# Altium PCB PCB_DTTT1.PcbDoc
Units mm, origin at the board's own origin, x right, y up, seen from the top; angles counter-clockwise.
Board outline 89.03 x 74.3 mm, 2 copper layers (Top Layer, Bottom Layer); 28 components, 18 nets, 65 pads, 1 vias.
Unrouted connection lines stored in the file: 42.
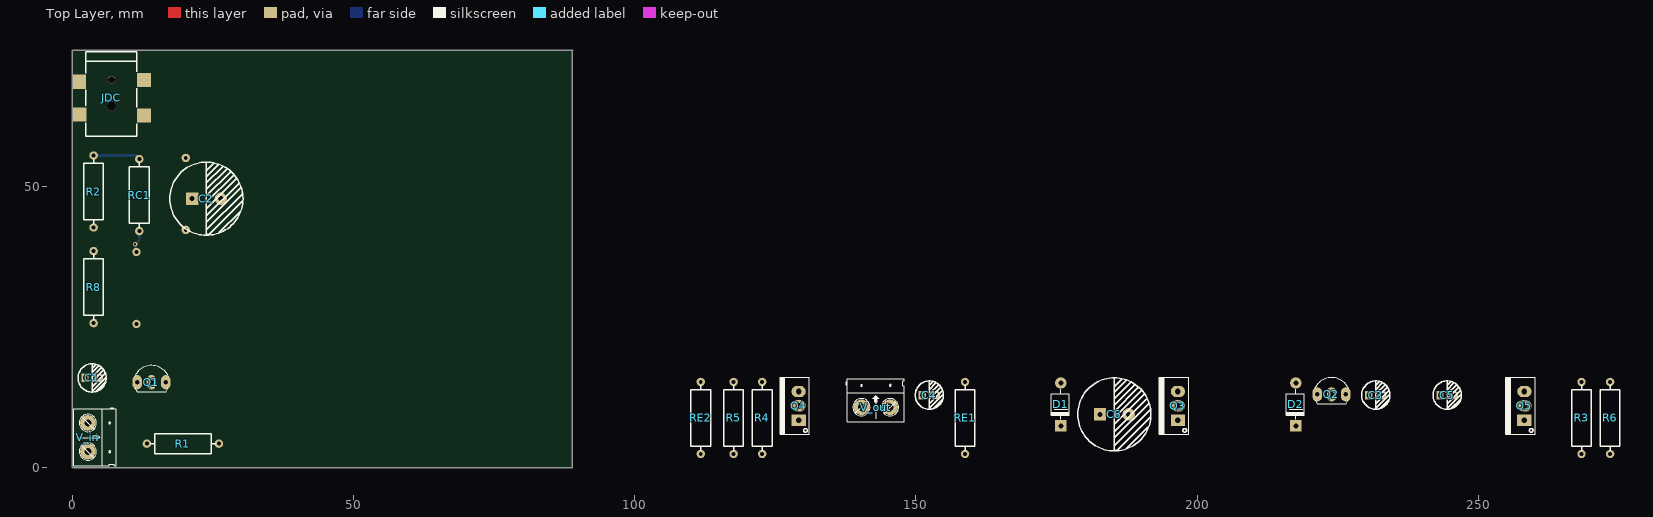
[diagram p0: Top Layer view]
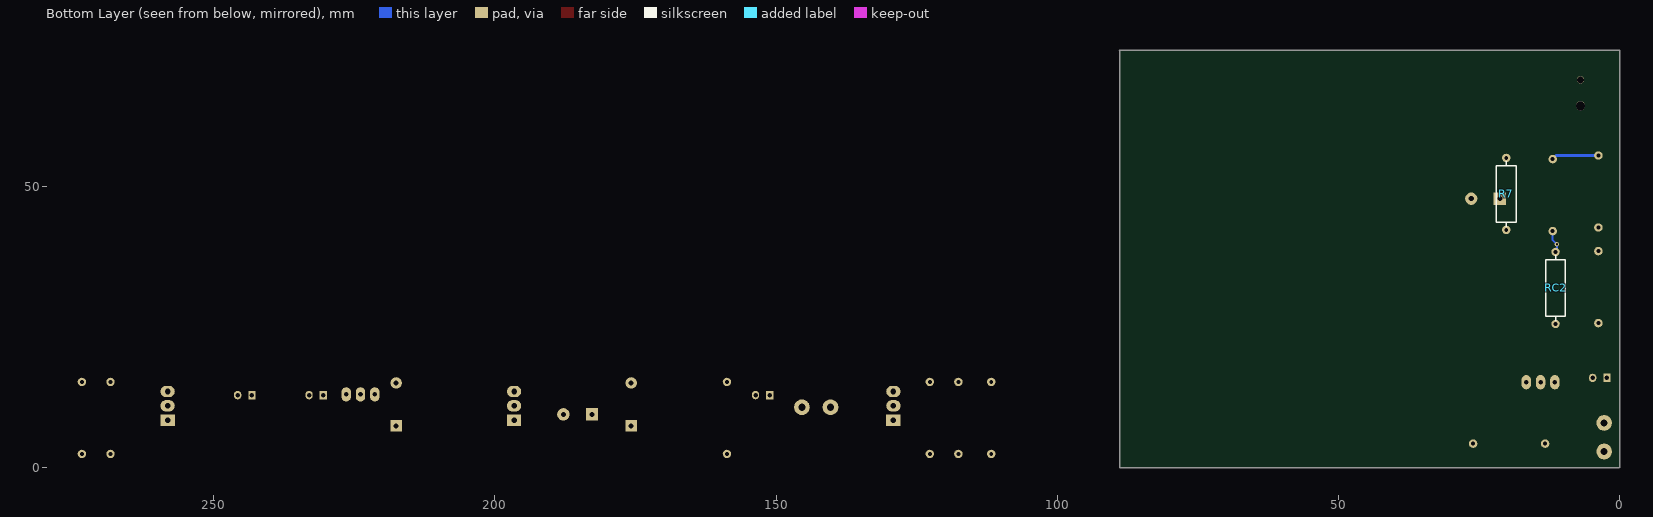
[diagram p1: Bottom Layer view, seen from below]

## Layer stack, top to bottom
Top Solder: solder mask 0.0102, Solder Resist, Dk 3.5
Top Layer: signal copper 0.0356
Dielectric 1: dielectric 0.32, FR-4, Dk 4.8
Bottom Layer: signal copper 0.0356
Bottom Solder: solder mask 0.0102, Solder Resist, Dk 3.5

## Board outline
0.127,-0.127 0,0 0,74.168 89.027,74.168 88.9,74.041 88.9,-0.127

## Design rules (kind name [scope] priority, off if disabled: settings)
Clearance [All] p1: gap=0.254 ignorepadtopadclearanceinfootprint=FALSE
PolygonConnect [All] p1: connectstyle=Relief reliefconductorwidth=0.5 reliefentries=4 polygonreliefangle="90 Angle" airgapwidth=0.5
RoomDefinition mach_nguyen_li_dttt1 [InComponentClass('mach_nguyen_li_dttt1')] p1: confinementstyle=ConfineIn formatcopy=TRUE lockcomponents=FALSE outline 90.17,1.27 297.307,1.27 297.307,18.796 90.17,18.796
RoutingLayers [All] p1: top layer_v5=FALSE bottom layer_v5=TRUE
RoutingVias [All] p1: holewidth=0.4 width=0.8 viastyle="Through Hole" minholewidth=0.4 minwidth=0.8 maxholewidth=0.4 maxwidth=0.8
SolderMaskExpansion [All] p1: expansion=0.102 istentingtop=FALSE
Width Signal [InNetClass('Signal')] p1: maxlimit=0.35 minlimit=0.254 preferedwidth=0.35
Width Power [InNetClass('Power')] p2: maxlimit=0.6 minlimit=0.254 preferedwidth=0.4
Width [All] p3: maxlimit=3 minlimit=0.5 preferedwidth=1.5
29 further rules are at their usual default settings.

## Classes and differential pairs
net class Signal: NetC1_1 NetC1_2 NetC2_1 NetC3_1 NetC3_2 NetC4_1 NetC4_2 NetC5_2 NetC6_1 NetC6_2 NetD1_1 NetQ1_1 NetQ2_1 NetR2_1 NetR4_1 NetRC1_1
net class Power: GND Vin

## Components (designator, comment, footprint, x,y, rotation, side; value= is the part's Value field where it differs from the comment)
C1 "100uF" "tu hoa 5mm" 3.556,15.875 r0 top
C2 "1000uF" "tu hoa 13mm" 23.876,47.742 r0 top
C3 "100uF" "tu hoa 5mm" 231.775,12.827 r0 top
C4 "100uF" "tu hoa 5mm" 152.4,12.827 r0 top
C5 "100uF" "tu hoa 5mm" 244.475,12.827 r0 top
C6 "1000uF" "tu hoa 13mm" 185.293,9.398 r0 top
D1 "100v" "DIODE 1A" 175.768,16.256 r90 top
D2 "100v" "DIODE 1A" 217.551,16.256 r90 top
JDC "Jack_DC" DC-IN_DC050-T 6.985,65.712 r270 top
Q1 "2N222" TO92-123 14.097,15.113 r0 top value=C1815
Q2 "2N222" TO92-123 223.901,12.954 r0 top value=C1815
Q3 "TIP41C" TO220-123 196.596,8.382 r90 top
Q4 "TIP42C" TO220-123 129.159,8.382 r90 top
Q5 "TIP41C" TO220-123 258.191,8.382 r90 top
R1 "10K" "tro vach 1/2w" 19.685,4.191 r0 top
R2 "46K" "tro vach 1/2w" 3.81,49.022 r90 top
R3 "330K" "tro vach 1/2w" 268.351,8.763 r90 top
R4 "30" "tro vach 1/2w" 122.682,8.763 r90 top
R5 "1K" "tro vach 1/2w" 117.602,8.763 r90 top
R6 "1K" "tro vach 1/2w" 273.431,8.763 r90 top
R7 "30" "tro vach 1/2w" 20.193,48.591 r90 bottom
R8 "56K" "tro vach 1/2w" 3.81,32.029 r90 top
RC1 "10K" "tro vach 1/2w" 11.938,48.387 r90 top
RC2 "10K" "tro vach 1/2w" 11.43,31.877 r90 bottom
RE1 "330" "tro vach 1/2w" 158.75,8.763 r90 top
RE2 "1K" "tro vach 1/2w" 111.76,8.763 r90 top
V_in "CON 2 KF301" "Con 2 KF301 5.08" 2.794,7.874 r270 top
V_out "CON 2 KF301" "Con 2 KF301 5.08" 140.335,10.668 r0 top

## Footprints (in the part's own frame and the unit in brackets; to place one, negate y for a bottom-side part, rotate by r counter-clockwise, add the part's x,y. Pads: shape width x height; smd on the part's side, far side on the other; paste and mask are expansions set on the pad)
"Con 2 KF301 5.08" [mil]
  round 110 hole 50: 1(0,0) 2(200,0)
  silkscreen extent -106,-100 300,200, body extent -45,-97 255,190, height 335
DC-IN_DC050-T [mm]
  rect 2.5x2.5 smd paste+0 mask+0.102: 1(-3.15,5.75) 1(3.15,5.75) 2(-2.828,-5.75) 3(3.026,-5.725)
  round 1.3 hole 1.3 unplated paste+0: ""(-3.15,0)
  round 1.6 hole 1.6 unplated paste+0: ""(1.45,0)
  silkscreen extent -8.15,-4.57 6.86,4.5, body extent -7.94,-6.54 6.86,6.46, height 11.01
"DIODE 1A" [mil]
  round 80 hole 35: 1(-50,0)
  rect 80x80 hole 35: 2(-350,0)
  silkscreen extent -305,-61 -95,65, body extent -366,-61 -34,65, height 122
TO92-123 [mil]
  oval 66x100 hole 32: 1(-100,0) 2(0,0) 3(100,0)
  silkscreen extent -117,-65 120,118, body extent -109,-66 109,95, height 245
TO220-123 [mil]
  rect 80x100 hole 39: 1(0,0)
  oval 80x100 hole 39: 2(100,0) 3(200,0)
  silkscreen extent -100,-76 300,130, body extent -95,-80 295,97, height 323
"tro vach 1/2w" [mm]
  round 1.5 hole 0.7: 1(-6.4,0) 2(6.4,0)
  silkscreen extent -5.84,-1.75 5.84,1.75, body extent -6.62,-1.75 6.62,1.75, height 3.5
"tu hoa 5mm" [mm]
  rect 1.3x1.5 hole 0.8: 1(-1.27,0)
  oval 1.3x1.5 hole 0.8: 2(1.27,0)
  silkscreen extent -2.51,-2.51 2.51,2.51, body extent -3.12,-3.18 3.23,3.18, height 14.55
"tu hoa 13mm" [mm]
  rect 2.2x2.2 hole 0.9: 1(-2.54,0)
  round 2.2 hole 0.9: 2(2.54,0)
  silkscreen extent -6.5,-6.5 6.5,6.5, body extent -6.25,-6.25 6.26,6.25, height 23.02

## Part data
C1 C3 C4 C5: library part "Tu Hoa 100uF 16V 5x11", "Cắm", Chung_Loai=Cắm, Don_Vi=Con, Ma_Hang=MH008417, So_Chan=2, Ten_Linh_Kien="Tụ Hóa 100uF 16V 5x11MM"
C2 C6: library part "Tu Hoa 1000uF 25V 13x21", "Cắm", Chung_Loai=Cắm, Don_Vi=Con, Ma_Hang=MH002315, So_Chan=2, Ten_Linh_Kien="Tụ Hóa 1000uF 25V 13x21MM"
D1 D2: library part "Diode 1N4007", "Cắm", Chung_Loai=Cắm, Don_Vi=Con, Ma_Hang=MH001063, Ten_Linh_Kien="Diode 1N4007 1A (DIP)"
JDC: library part DC050-T, "Surface Mount，Right Angle DC Power Receptacle 2mm 6.4mm 4A 16V SMD AC/DC Power Connectors ROHS", Manufacture="SHOU HAN", Category=Connector, Creator=Manhpd, Detailed Value=Jack_DC, Link sale=#https://www.lcsc.com/product-detail/AC-DC-Power-Connectors_SHOU-HAN-DC050-T_C431534.html#, Mounting type="Surface Mount", PartNumber=DC050-T
Q1 Q2: "NPN 600mW, ECB"
Q3 Q5: "NPN 2W, BCE"
Q4: "PNP 2W, BCE"
R1 R2 R3 R4 R5 R6 R7 R8 RC1 RC2 RE1 RE2: library part "Tro Vach 1/2W 5% 820R", "Cắm", Chung_Loai=Cắm, Don_Vi=Con, Ma_Hang=MH006202, So_Chan=2, Ten_Linh_Kien="Trở 5% 1/2w 820R"
V_in V_out: "Cắm", Chung_Loai=Cắm, Don_Vi=Con, Ma_Hang=MH000987, Ten_Linh_Kien="CON 2 KF301-2P 5.08MM Xanh Dương"

## Via types
v1: diameter 0.8, hole 0.4, Top Layer to Bottom Layer, 1 vias

## Nets (pads, with @x,y where several pads share a name; then routed paths per layer and width w, separated by ;. In a path a pad name is that pad's centre, name@x,y a point inside that pad or via, vN(x,y) a via of type N, cw(c..) or ccw(c..) an arc to the next point about the centre after c; other vN are vias at no path point)
GND: C2.2 JDC.2 Q4.2 R1.1 R5.1 R7.1 RE2.1 V_in.1 V_out.1
NetC1_1: C1.1 V_in.2
NetC1_2: C1.2 Q1.2 R1.2 R8.1
NetC2_1: C2.1 RE1.1 RE2.2
NetC3_1: C3.1 Q1.3 RC2.1
NetC3_2: C3.2 Q2.2 R3.1
NetC4_1: C4.1 C5.1 Q3.3 R4.2
NetC4_2: C4.2 D1.2 Q4.1 R5.2
NetC5_2: C5.2 D2.1 Q5.1 R6.1
NetC6_1: C6.1 Q4.3 Q5.3
NetC6_2: C6.2 V_out.2
NetD1_1: D1.1 D2.2
NetQ1_1: Q1.1 RE1.2
NetQ2_1: Q2.1 Q3.1
NetR2_1: R2.1 R8.2
NetR4_1: R4.1 R7.2
NetRC1_1: RC1.1 RC2.2 | length 3.9
  Bottom Layer w0.35: RC2.2@11.176,38.429 v1(11.176,39.624) 11.938,40.386 RC1.1
Vin: JDC.1 Q2.3 Q3.2 Q5.2 R2.2 R3.2 R6.2 RC1.2 | length 7.5
  Bottom Layer w0.6: R2.2 11.303,55.422
pads on no net: JDC. JDC.3